# Altium PCB B155AA.PcbDoc
Units mm, origin at the board's own origin, x right, y up, seen from the top; angles counter-clockwise.
Board outline 40.25 x 32.25 mm, 2 copper layers (Top Layer, Bottom Layer), stack 1.57 mm thick; 27 components, 17 nets, 119 pads, 27 vias.
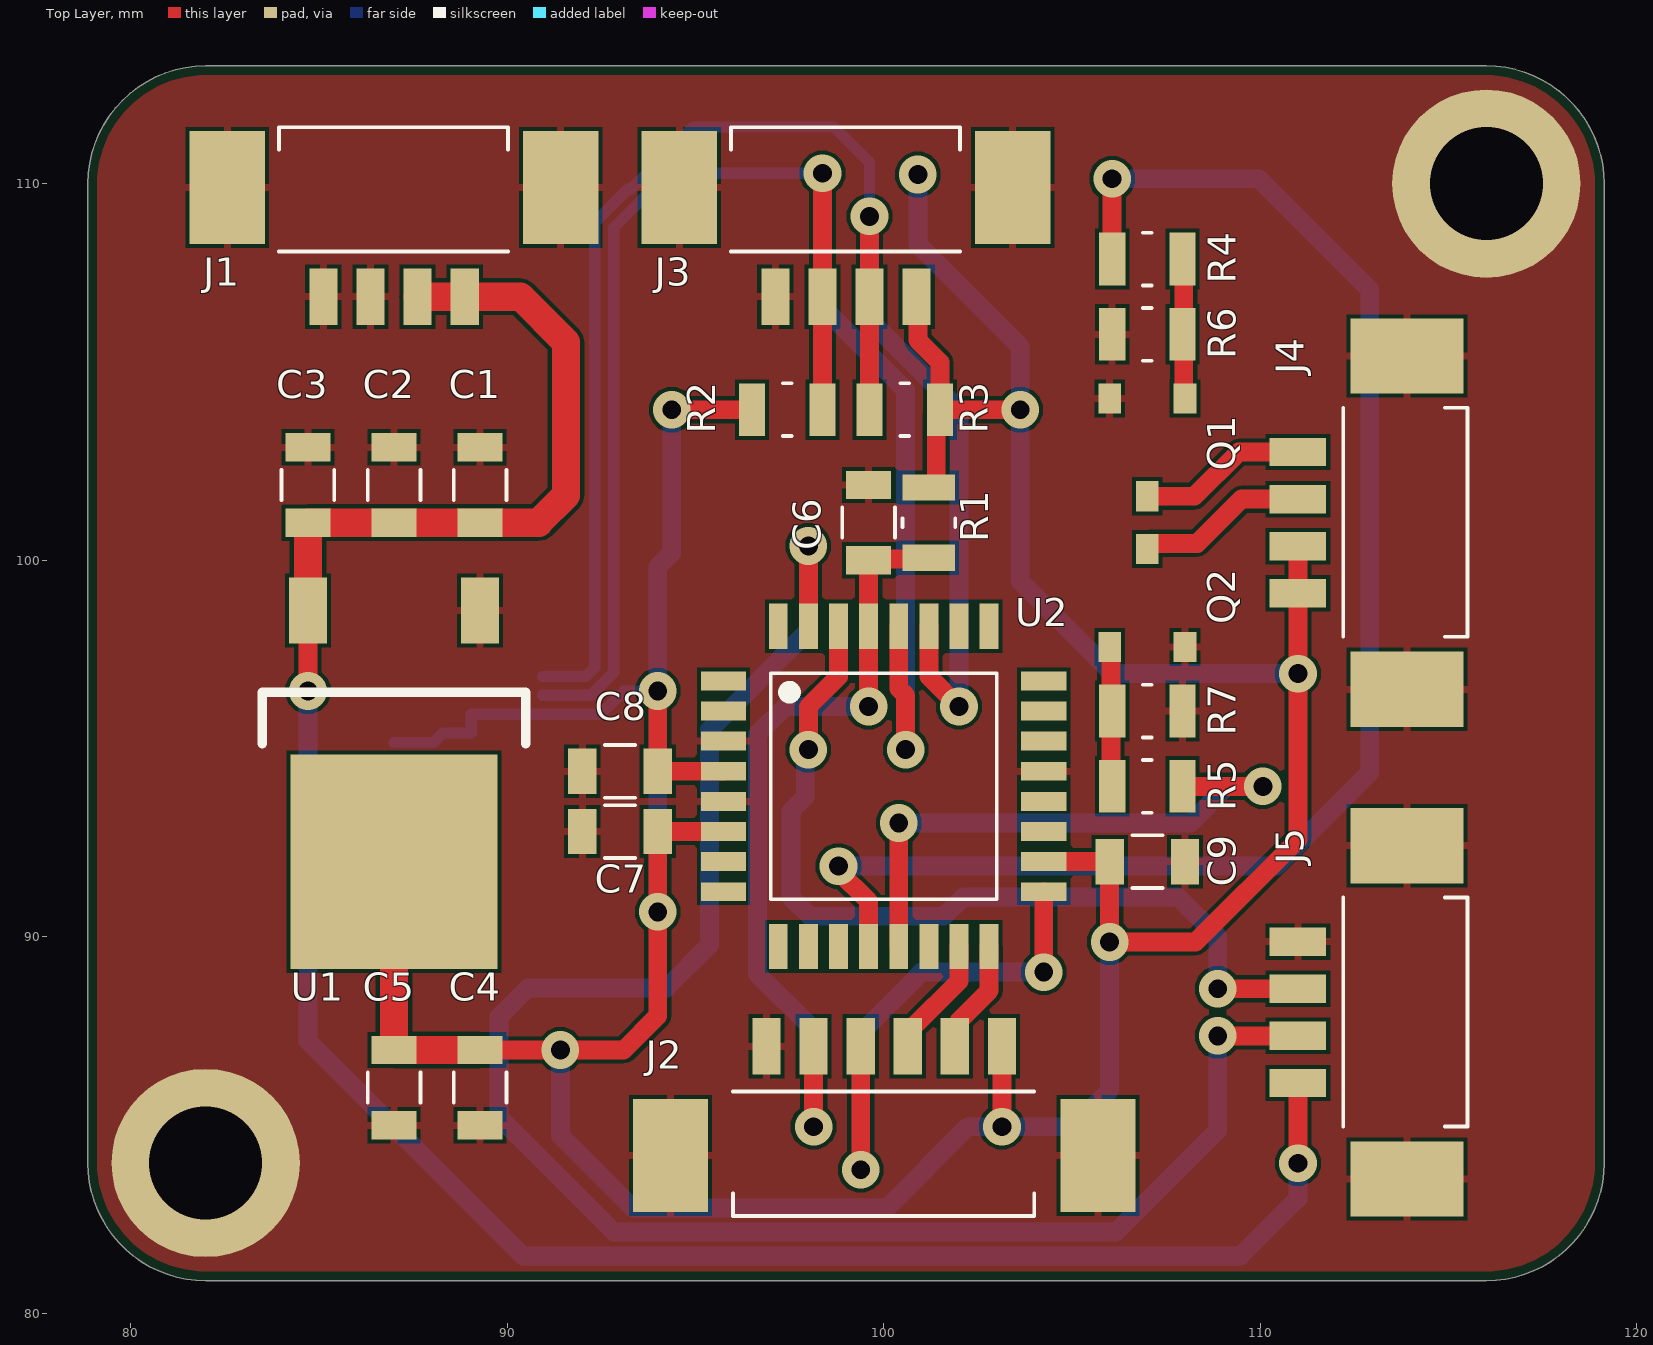
[diagram p0: Top Layer view]
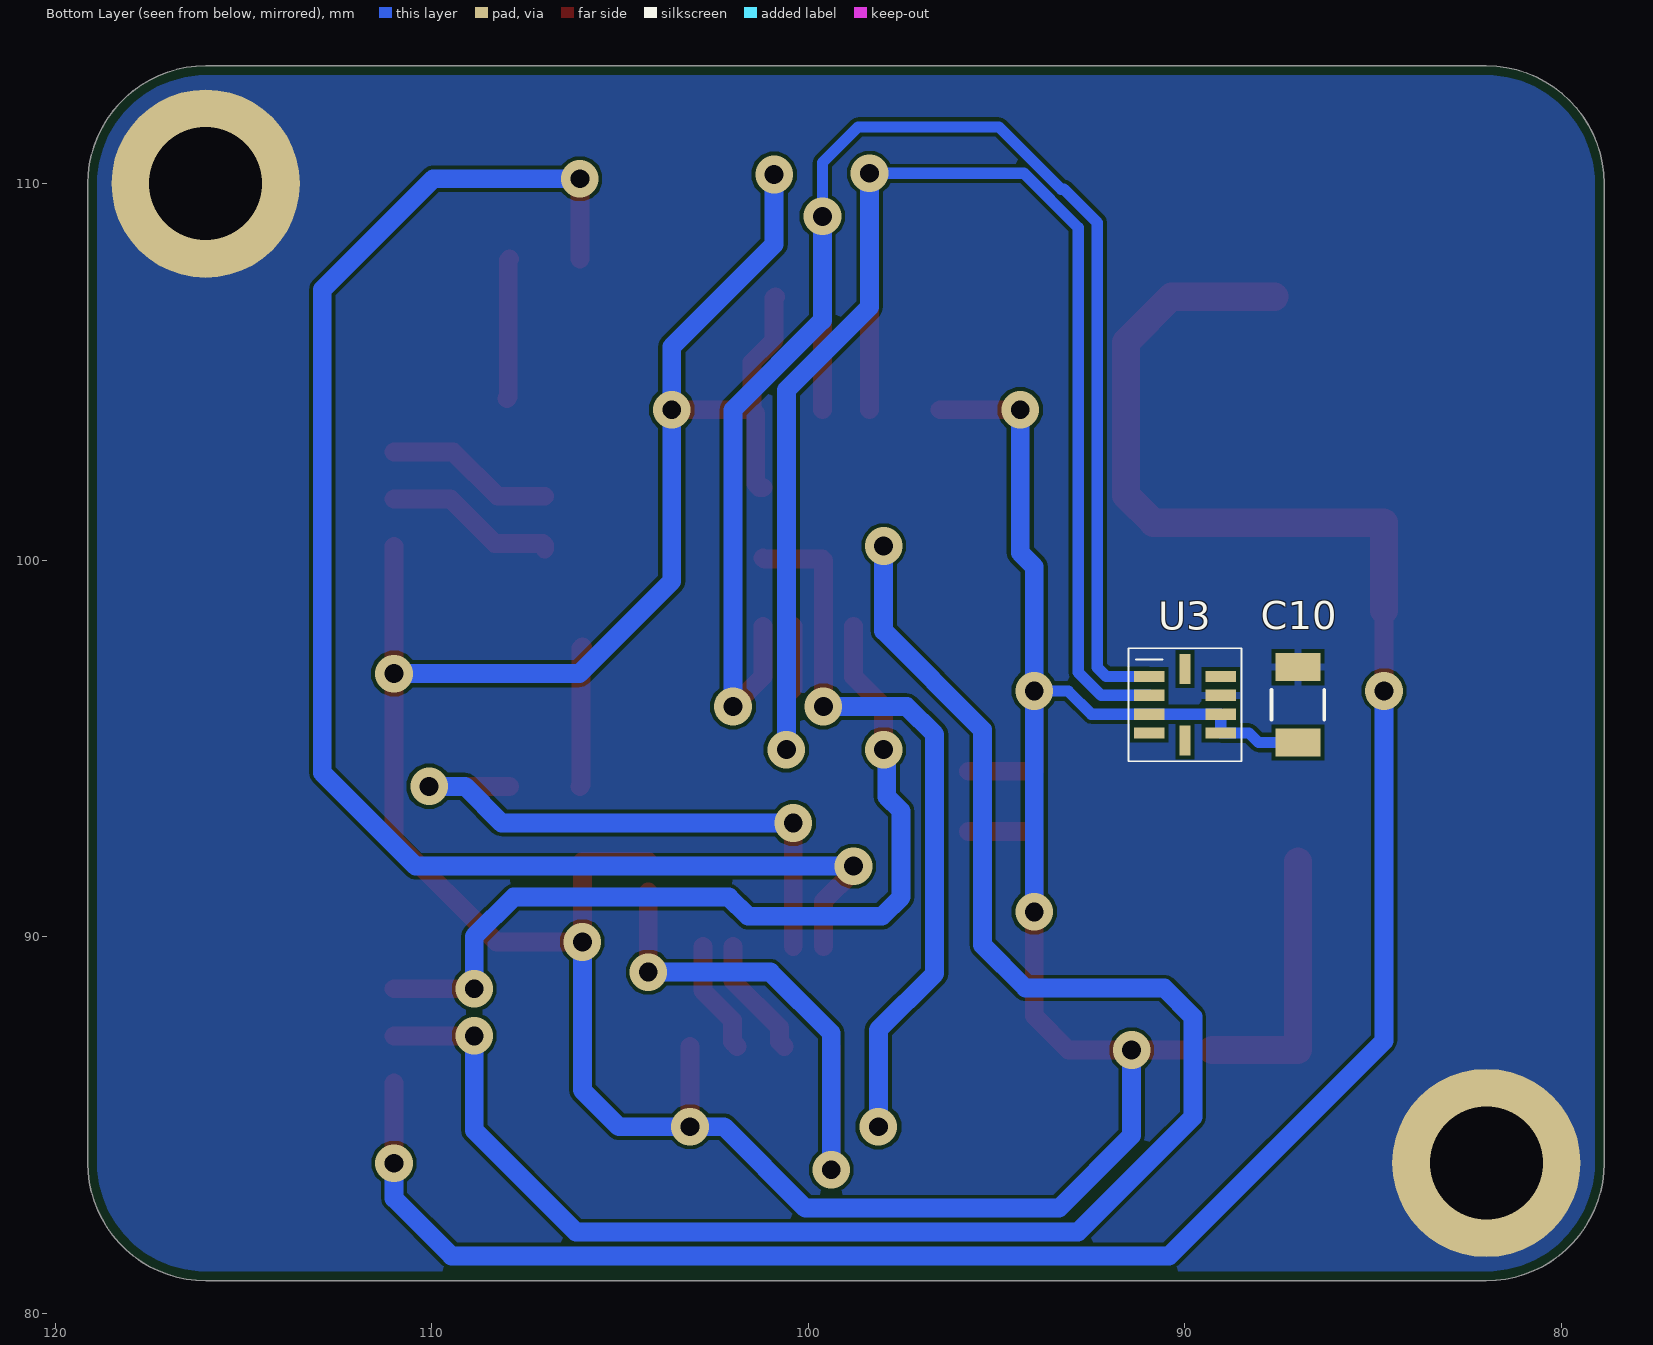
[diagram p1: Bottom Layer view, seen from below]
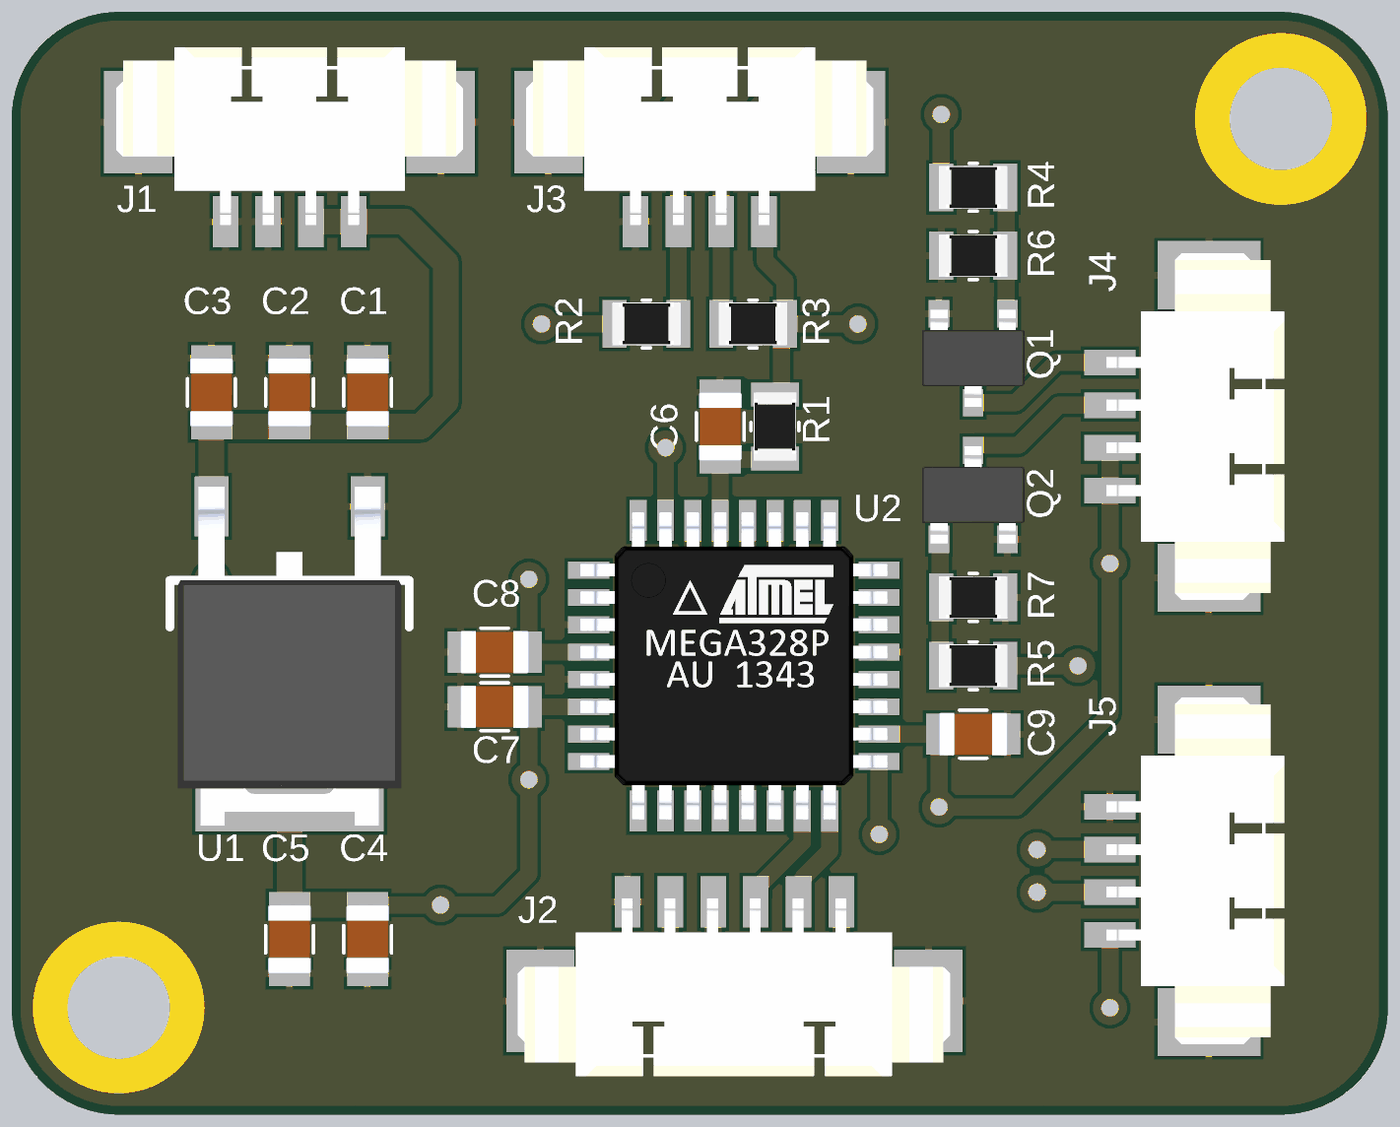
[diagram p2: 3D render of the assembled board from above, using the file's embedded part models]

## Layer stack, top to bottom
Top Solder: solder mask 0.0127, Solder Resist, Dk 3.8
Top Layer: signal copper 0.035
Dielectric: core 1.5, FR-4, Dk 4.5
Bottom Layer: signal copper 0.035
Bottom Solder: solder mask 0.0127, Solder Resist, Dk 3.8

## Board outline
78.873,84.068 78.873,110 78.873,110.001 cw(c82,110) 82,113.127 116,113.127 cw(c116,110) 119.127,110 119.127,84 cw(c116,84) 116,80.873 82,80.873 cw(c82,84)

## Design rules (kind name [scope] priority, off if disabled: settings)
BoardOutlineClearance [All] p1: gap=0.25 ignorepadtopadclearanceinfootprint=FALSE except(0: Arc-SplitContinuation Track-SplitContinuation SMDPad-SplitContinuation THPad-SplitContinuation Via-SplitContinuation Fill-SplitContinuation Poly-SplitContinuation Region-SplitContinuation Text-SplitContinuation)
Clearance Clearance-xPP-xTP-xTT [All] p1: gap=0.1 ignorepadtopadclearanceinfootprint=FALSE except(0: Arc-Hole Track-Hole SMDPad-Hole THPad-Hole Via-Hole Fill-Hole Poly-Hole Region-Hole Text-Hole)
ComponentClearance [All] p1: gap=0.25 collisioncheckmode=3 verticalgap=0.25 showdistances=FALSE
DiffPairsRouting [All] p1: maxlimit=0.25 minlimit=0.25 mostfreqgap=0.25 toplayer_minwidth=0.381 toplayer_maxwidth=0.381 toplayer_prefwidth=0.381 bottomlayer_minwidth=0.381 bottomlayer_maxwidth=0.381 bottomlayer_prefwidth=0.381 maxuncoupledlength=12.5
Height [All] p1: minheight=0 maxheight=25 prefheight=12.5
HoleSize HoleSize-PTH [All] p1: absolutevalues=TRUE maxlimit=5 minlimit=0.15 maxpercent=80.000 minpercent=20.000
HoleToHoleClearance [All] p1: gap=0.35 allowstackedmicrovias=TRUE
MinimumAnnularRing "Minimum IAR  <= 0.45mm" [((ObjectKind = 'Pad') OR (ObjectKind = 'Via')) And (Layer = 'MultiLayer') And (HoleDiameter <= AsMM(0.45))] p1: minimumring=0.125 // minimum inner annular ring for pads <= 0.45mm finished hole size
MinimumAnnularRing "Minimum IAR  > 0.45mm" [((ObjectKind = 'Pad') OR (ObjectKind = 'Via')) And (Layer = 'MultiLayer') And (HoleDiameter > AsMM(0.45))] p2: minimumring=0.125 // minimum inner annular ring for pads > 0.45mm finished hole size
MinimumAnnularRing Minimum-IAR [All] p3: minimumring=0.125
MinimumSolderMaskSliver [All] p1: minsoldermaskwidth=0.08
PlaneClearance [InNet('ANT_GSM')] p1: clearance=0.05
PlaneClearance PlaneClearance-IPI [All] p2: clearance=0.25
PlaneConnect [All] p1: planeconnectstyle=Relief reliefexpansion=0.175 reliefentries=4 reliefconductorwidth=0.2 reliefairgap=0.1
PolygonConnect PolygonConnect_Via [All vs (ObjectKind = 'Via') And (HoleDiameter <= AsMM(0.45))] p1: connectstyle=Direct reliefconductorwidth=0.254 reliefentries=4 polygonreliefangle="90 Angle" airgapwidth=0.254
PolygonConnect PolygonConnect-xTW [All] p2: connectstyle=Relief reliefconductorwidth=0.2 reliefentries=4 polygonreliefangle="90 Angle" airgapwidth=0.1
RoutingCorners [All] p1: cornerstyle=45-Degree minsetback=2.5 maxsetback=2.5
RoutingVias "RoutingVias <= 0.45mm" [(ObjectKind = 'Via') And (HoleDiameter <= AsMM(0.45))] p1: holewidth=0.2 width=0.55 viastyle="Through Hole" minholewidth=0.15 minwidth=0.5 maxholewidth=0.45 maxwidth=0.8
RoutingVias "RoutingVias > 0.45mm" [(ObjectKind = 'Via') And (HoleDiameter > AsMM(0.45))] p2: holewidth=0.5 width=0.85 viastyle="Through Hole" minholewidth=0.5 minwidth=0.85 maxholewidth=0.9 maxwidth=1.25
SilkToSilkClearance [All] p1: silktosilkclearance=0.2
SilkToSolderMaskClearance SilkscreenOverComponentPads [IsPad] p1: minsilkscreentomaskgap=0.1 clearancetoexposedcopper=TRUE
SolderMaskExpansion SolderMaskExpansion_Via [(ObjectKind = 'Via') And (HoleDiameter <= AsMM(0.45))] p1: expansion=0.01 istentingtop=TRUE soldermaskfromhole=TRUE
SolderMaskExpansion [All] p2: expansion=0.01 istentingtop=FALSE
UnRoutedNet [All] p1: checkbadconnections=TRUE
Width Width-xTW [All] p1: maxlimit=1.5 minlimit=0.1 preferedwidth=0.2
18 further rules are at their usual default settings.

## Classes and differential pairs
component class "UV Sensor": C10 J3 R2 R3 U3
component class "UV LED": J4 Q1 Q2 R4 R5 R6 R7
component class "Power Regulator": C1 C2 C3 C4 C5 J1 U1
component class MCU: C6 C7 C8 C9 J2 R1 U2
component class B155AA: J5

## Components (designator, comment, footprint, x,y, rotation, side; value= is the part's Value field where it differs from the comment)
C1 "Capacitor - 22uF [1210] (Ceramic)" CAPACITOR_0805 89.285,102 r270 top value=22uF
C2 "Capacitor - 22uF [1210] (Ceramic)" CAPACITOR_0805 87,102 r270 top value=22uF
C3 "Capacitor - 100nF [0805] (MLCC)" CAPACITOR_0805 84.715,102 r270 top value=100nF
C4 "Capacitor - 22uF [1210] (Ceramic)" CAPACITOR_0805 89.285,86 r90 top value=22uF
C5 "Capacitor - 100nF [0805] (MLCC)" CAPACITOR_0805 87,86 r90 top value=100nF
C6 "Capacitor - 100nF [0805] (MLCC)" CAPACITOR_0805 99.6,101 r270 top value=100nF
C7 "Capacitor - 100nF [0805] (MLCC)" CAPACITOR_0805 93,92.8 r0 top value=100nF
C8 "Capacitor - 100nF [0805] (MLCC)" CAPACITOR_0805 93,94.4 r0 top value=100nF
C9 "Capacitor - 100nF [0805] (MLCC)" CAPACITOR_0805 107,92 r180 top value=100nF
C10 "Capacitor - 100nF [0805] (MLCC)" CAPACITOR_0805 87,96.165 r270 bottom value=100nF
J1 "4P SMD Tunic Connector" "Connector_Tunic 4P" 87,108 r180 top
J2 "6P Tunic Connector" "Connector_Tunic 6P" 100,86.095 r0 top
J3 "4P SMD Tunic Connector" "Connector_Tunic 4P" 99,108 r180 top
J4 "4P SMD Tunic Connector" "Connector_Tunic 4P" 112,101 r90 top
J5 "4P SMD Tunic Connector" "Connector_Tunic 4P" 112,88 r90 top
Q1 "BC847AQAZ" SOT-23-3 107,103 r90 top
Q2 "BC847AQAZ" SOT-23-3 107,99 r270 top
R1 "10K - 0805 - %1 - 1/16W" RESISTOR_0805 101.2,101 r90 top value=10K
R2 "10K - 0805 - %1 - 1/16W" RESISTOR_0805 97.44,104 r180 top value=10K
R3 "10K - 0805 - %1 - 1/16W" RESISTOR_0805 100.56,104 r0 top value=10K
R4 "4K7 - 0805 - %1 - 1/16W" RESISTOR_0805 107,108 r180 top value=4K7
R5 "4K7 - 0805 - %1 - 1/16W" RESISTOR_0805 107,94 r0 top value=4K7
R6 "47K - 0805 - %1 - 1/2W" RESISTOR_0805 107,106 r0 top value=47K
R7 "47K - 0805 - %1 - 1/2W" RESISTOR_0805 107,96 r180 top value=47K
U1 "LDO Regulator" TO-252 87,92 r180 top
U2 "8-bit MicroController" TQFN-32 100,94 r0 top
U3 "Si1145-A10-GMR" SI1145 90,96.165 r180 bottom

## Footprints (in the part's own frame and the unit in brackets; to place one, negate y for a bottom-side part, rotate by r counter-clockwise, add the part's x,y. Pads: shape width x height; smd on the part's side, far side on the other; paste and mask are expansions set on the pad)
CAPACITOR_0805 [mm] "0805 Case Capacitor"
  rect 0.75x1.2 smd mask+0.01: 1(-1,0) 2(1,0)
  silkscreen extent -0.4,-0.7 0.4,0.7, body extent -1,-0.63 1,0.63, height 1.44
"Connector_Tunic 4P" [mm] "4P Tunic Connector"
  rect 0.75x1.5 smd mask+0.01: 1(-1.875,1) 2(-0.625,1) 3(0.625,1) 4(1.875,1)
  rect 2x3 smd mask+0.01: 5(-4.425,-1.9) 6(4.425,-1.9)
  silkscreen extent -3.03,-3.5 3.05,-0.2, body extent -5.07,-4.1 5.08,1.1, height 3.4
"Connector_Tunic 6P" [mm] "6P Tunic Connector"
  rect 0.75x1.5 smd mask+0.01: 1(3.14,1) 2(1.89,1) 3(0.64,1) 4(-0.61,1) 5(-1.86,1) 6(-3.11,1)
  rect 2x3 smd mask+0.01: 7(-5.66,-1.9) 8(5.69,-1.9)
  silkscreen extent -4,-3.5 4,-0.2, body extent -6.32,-4.1 6.32,1.1, height 3.4
RESISTOR_0805 [mm] "Chip Resistor, IPC High Density"
  rect 0.7x1.4 smd mask+0.01: 1(-0.935,0) 2(0.935,0)
  silkscreen extent -0.12,-0.7 0.12,0.7, body extent -1,-0.63 1,0.63, height 0.45
SI1145 [mm] "UV Sensor"
  rect 0.8x0.3 smd mask+0.01: 1(-0.95,0.75) 2(-0.95,0.25) 3(-0.95,-0.25) 4(-0.95,-0.75) 6(0.95,-0.75) 7(0.95,-0.25) 8(0.95,0.25) 9(0.95,0.75)
  rect 0.3x0.8 smd mask+0.01: 5(0,-0.95) 10(0,0.95)
  silkscreen extent -1.5,-1.5 1.5,1.5, body extent -1.02,-1.02 1.02,1.02, height 0.7
SOT-23-3 [mm]
  rect 0.8x0.6 smd mask+0.01: 1(1.3,-1) 2(1.3,1) 3(-1.3,0)
  body extent -1.42,-1.5 1.42,1.5, height 1.22
TO-252 [mm] "LDO Voltage Regulators 800MA LDO LINEAR REG"
  rect 1x1.75 smd mask+0.01: 1(-2.285,-6.665) 3(2.285,-6.665)
  rect 5.5x5.7 smd mask+0.01: 2(0,0)
  silkscreen extent -3.5,-4.5 3.5,-3.14, body extent -3.27,-7.24 3.27,2.67, height 2.55
TQFN-32 [mm]
  rect 1.2x0.5 smd mask+0.01: 1(-4.25,2.8) 2(-4.25,2) 3(-4.25,1.2) 4(-4.25,0.4) 5(-4.25,-0.4) 6(-4.25,-1.2) 7(-4.25,-2) 8(-4.25,-2.8) 17(4.25,-2.8) 18(4.25,-2) 19(4.25,-1.2) 20(4.25,-0.4) 21(4.25,0.4) 22(4.25,1.2) 23(4.25,2) 24(4.25,2.8)
  rect 0.5x1.2 smd mask+0.01: 9(-2.8,-4.25) 10(-2,-4.25) 11(-1.2,-4.25) 12(-0.4,-4.25) 13(0.4,-4.25) 14(1.2,-4.25) 15(2,-4.25) 16(2.8,-4.25) 25(2.8,4.25) 26(2,4.25) 27(1.2,4.25) 28(0.4,4.25) 29(-0.4,4.25) 30(-1.2,4.25) 31(-2,4.25) 32(-2.8,4.25)
  silkscreen extent -3,-3 3,3, body extent -4.5,-4.5 4.5,4.5, height 1.1

## Part data
C1 C2 C4: library part "Capacitor - 22uF [0805-25V]", "Multilayer Ceramic Capacitors MLCC - SMD/SMT 22UF 25V 10% 1210", Case=0805, Manufacturer Name=Murata, Manufacturer Part Number=GRM21BR61E226ME44L, Tolerance=20%, Voltage=25V
C3 C5 C6 C7 C8 C9 C10: library part "Capacitor - 100nF [0805-10V]", "Capacitor (MLCC) - 100nF / 10V / 0805", Case=0805, Manufacturer Name=KEMET, Manufacturer Part Number=C0805C104K8JACAUTO, Tolerance=%1, Voltage=10V, Subcategory=Capacitors
J1 J3 J4 J5: library part "Connector - Mini Tunic 4P (1.25)", "Mini Tunic Connector with 4P", Case=SMD, Manufacturer Name=Molex, Manufacturer Part Number=53261-0471, ComponentLink1Description=DataSheet, ComponentLink1URL=https://www.mouser.com.tr/datasheet/2/276/0532610471_PCB_HEADERS-170942.pdf, ComponentLink2Description=Mouser, ComponentLink2URL=https://www.mouser.com.tr/ProductDetail/Molex/53261-0471?qs=%2Fha2pyFaduhLhIsk8tywtK7BwWtguBSP4XxyDBTOTfs%3D, Pitch=1.25mm, Position=4, ROHS=Yes
J2: library part "Connector - Mini Tunic 6P (1.25)", "Mini Tunic Connector with 6P", Manufacturer Name=Molex, Manufacturer Part Number=53261-0671, ROHS=Yes
Q1 Q2: library part "Transistor - BC847 (SOT23-3)", "Bipolar NPN Transistors", Case=SOT23-3, Manufacturer Name=Nexperia, Manufacturer Part Number=BC847, Polarity=NPN
R1 R2 R3: library part "Resistor - 10K [0805]", "Thick Film Resistors - SMD 1/16 W 10 KOhm 1%", Case=0805, Manufacturer Name=Vishay, Manufacturer Part Number=CRCW040210K0FKED, Power=1/16W, Tolerance=%1, ComponentLink1Description=DataSheet, ComponentLink1URL=https://www.mouser.com.tr/datasheet/2/427/dcrcwe3-1762152.pdf, ComponentLink2Description=Mouser, ComponentLink2URL=https://www.mouser.com.tr/ProductDetail/Vishay-Dale/CRCW040210K0FKED?qs=sGAEpiMZZMu61qfTUdNhG2DpbjADlD3GcalbOv9utCY%3D
R4 R5: library part "Resistor - 4K7 [0805]", "Thick Film Resistors - SMD 1/16 W 4.7 KOhm 1%", Case=0805, Manufacturer Name=Vishay, Manufacturer Part Number=CRCW08054K70FKEC, Power=1/8W, Tolerance=%1, ComponentLink1Description=DataSheet, ComponentLink1URL=https://www.mouser.com.tr/datasheet/2/427/dcrcwe3-1762152.pdf, ComponentLink2Description=Mouser, ComponentLink2URL=https://www.mouser.com.tr/ProductDetail/Vishay-Dale/CRCW04024K70FKED?qs=sGAEpiMZZMu61qfTUdNhG7nHf%2F6MTUn3HadIdDQu24Q%3D
R6 R7: library part "Resistor - 47K [0805]", "Thick Film Resistors - SMD 1/2 W 47 KOhm 1%", Case=0805, Manufacturer Name=Vishay, Manufacturer Part Number=CRCW080547K0FKECHP, Power=1/2W, Tolerance=%1
U1: library part "IC - LM1117DT-3.3/NOPB", "LDO Voltage Regulators 800MA LDO LINEAR REG", Case=TO-252-3, Manufacturer Name="Texas Instruments", Manufacturer Part Number=LM1117DT-3.3/NOPB
U2: library part "IC - ATMEGA328P-AU", "8-bit Microcontrollers - MCU 32KB In-system Flash 20MHz 1.8V-5.5V", Case=TQFP-32, Manufacturer Name="Microchip Technology / Atmel", Manufacturer Part Number=ATMEGA328P-AU, Maximum Operating Temperature=+85, Minimum Operating Temperature=-40, Supply Voltage - Max=5.5V, Supply Voltage - Min=1.8V, ComponentLink1Description=DataSheet, ComponentLink1URL=http://ww1.microchip.com/downloads/en/DeviceDoc/ATmega48A-PA-88A-PA-168A-PA-328-P-DS-DS40002061A.pdf, ComponentLink2Description=Mouser, ComponentLink2URL=https://www.mouser.com.tr/ProductDetail/Microchip-Technology-Atmel/ATMEGA328P-AU?qs=sGAEpiMZZMtVoztFdqDXO3RbBx7FKCmV, ComponentLink3Description=ProductPage, ComponentLink3URL=https://www.microchip.com/wwwproducts/en/ATmega328p, Height=1mm, ROHS=Yes
U3: library part "IC - Si1145-A10-GMR", "Proximity Sensors I2C UV Index and Proximity/Ambient Light Sensor with 1 LED Driver", Case=QFN-10, Manufacturer Name="Silicon Labs", Manufacturer Part Number=SI1145-A10-GMR, ROHS=Yes

## Free pads (board coordinates)
  round 5 hole 3: 2(82,84) 2(116,110)

## Via types
v1: diameter 1, hole 0.5, Top Layer to Bottom Layer, tented both sides, 27 vias

## Nets (pads, with @x,y where several pads share a name; then routed paths per layer and width w, separated by ;. In a path a pad name is that pad's centre, name@x,y a point inside that pad or via, vN(x,y) a via of type N, cw(c..) or ccw(c..) an arc to the next point about the centre after c; other vN are vias at no path point)
3V3: C4.2 C5.2 C7.2 C8.2 C9.2 C10.2 J2.1 J3.1 J4.1 J4.2 R1.2 R2.2 R3.2 U1.2 U2.4 U2.6 U2.18 U3.3 U3.6 U3.7 | length 117.2
  Top Layer w0.5: C4.2 v1(91.417,87) 93.096,87 94,87.904 v1(94,90.668) C7.2 U2.6 ; v1(94,96.532) C8.2 U2.4 ; v1(94.373,104) R2.2 ; J3.1 100.908,106.967 100.908,105.848 101.495,105.261 R3.2 ; R1.2 101.295,101.935 101.395,102.035 101.395,103.9 R3.2 ; v1(103.14,84.963) J2.1 ; v1(103.627,104) R3.2 ; U2.18 C9.2 v1(106,89.868) 108.283,89.868 111,92.585 v1(111,96.993) J4.1 J4.2
  Top Layer w0.75: U1.2 C5.2 C4.2
  Bottom Layer w0.3: C10.2 88.05,95.165 88.3,95.415 U3.6 U3.7 U3.3 92.486,95.915 93.103,96.532 v1(94,96.532)
  Bottom Layer w0.5: v1(91.417,87) 91.417,84.732 93.345,82.804 100.076,82.804 102.235,84.963 105.029,84.963 106,85.934 v1(106,89.868) ; v1(94,90.668) v1(94,96.532) 94,99.83 94.373,100.203 v1(94.373,104) ; v1@100.908,110.267 v1(100.908,110.242) 100.908,108.388 103.627,105.669 v1(103.627,104) 103.627,99.446 106.08,96.993 v1(111,96.993)
BAT+: C1.2 C2.2 C3.2 J1.1 J1.2 J5.1 U1.3 | length 61.8
  Top Layer w0.5: v1(84.715,96.533) U1.3 ; v1(111,83.993) J5.1
  Top Layer w0.75: U1.3 C3.2 C2.2 C1.2 90.84,101 91.567,101.727 91.567,105.791 90.358,107 J1.1 J1.2
  Bottom Layer w0.5: v1(84.715,96.533) 84.715,87.243 90.424,81.534 109.474,81.534 111,83.06 v1(111,83.993)
GND: C1.1 C2.1 C3.1 C4.1 C5.1 C6.1 C7.1 C8.1 C9.1 C10.1 J1.3 J1.4 J1.5 J1.6 J2.6 J2.7 J2.8 J3.4 J3.5 J3.6 J4.5 J4.6 J5.4 J5.5 J5.6 pad.2 Q1.2 Q2.2 R6.1 R7.1 U1.1 U2.3 U2.5 U2.21 U3.8
MISO: J2.2 U2.16 | length 3
  Top Layer w0.5: J2.2 102.015,87.22 102.015,87.791 102.8,88.576 U2.16
MOSI: J2.3 U2.15 | length 3.2
  Top Layer w0.5: J2.3 100.765,87.22 100.765,87.595 102,88.83 U2.15
NetJ4_3: J4.3 Q2.3 | length 4.6
  Top Layer w0.5: Q2.3 107,100.4 107.05,100.45 108.324,100.45 109.499,101.625 J4.3
NetJ4_4: J4.4 Q1.3 | length 4.5
  Top Layer w0.5: Q1.3 108.25,101.7 109.425,102.875 J4.4
R\E\S\E\T\: C6.2 J2.5 R1.1 U2.29 | length 21.9
  Top Layer w0.5: v1(98.14,84.963) J2.5 ; v1(99.6,96.118) U2.29 C6.2 99.633,100.032 101.168,100.032 R1.1
  Bottom Layer w0.5: v1(98.14,84.963) 98.14,87.534 96.647,89.027 96.647,95.377 97.388,96.118 v1(99.6,96.118)
RX: J5.3 U2.30 | length 23.4
  Top Layer w0.5: v1(98,94.975) 98,96.11 98.8,96.91 U2.30 ; v1(108.868,88.625) J5.3
  Bottom Layer w0.5: v1(98,94.975) 97.916,94.891 97.916,93.725 97.536,93.345 97.536,91.059 98.044,90.551 101.6,90.551 102.108,91.059 107.823,91.059 108.868,90.014 v1(108.868,88.625)
SCK: J2.4 U2.17 | length 14.6
  Top Layer w0.5: v1(99.39,83.82) J2.4 ; v1(104.25,89.068) U2.17
  Bottom Layer w0.5: v1(99.39,83.82) 99.39,87.452 101.006,89.068 v1(104.25,89.068)
SCL: J3.3 R2.1 U2.28 U3.2 | length 45.9
  Top Layer w0.5: R2.1 J3.3 v1(98.375,110.275) ; U2.28 100.4,96.597 100.584,96.413 v1(100.584,94.975)
  Bottom Layer w0.3: U3.2 92.224,96.415 92.837,97.028 92.837,108.839 94.273,110.275 v1(98.375,110.275)
  Bottom Layer w0.5: v1(98.375,110.275) 98.375,106.73 100.584,104.521 v1(100.584,94.975)
SDA: J3.2 R3.1 U2.27 U3.1 | length 45.1
  Top Layer w0.5: R3.1 J3.2 v1(99.625,109.132) ; U2.27 101.2,96.918 v1(102,96.118)
  Bottom Layer w0.3: U3.1 92.089,96.915 92.329,97.155 92.329,108.966 93.218,109.855 93.287,109.855 94.938,111.506 98.679,111.506 99.625,110.56 v1(99.625,109.132)
  Bottom Layer w0.5: v1(99.625,109.132) 99.625,106.369 102,103.994 v1(102,96.118)
TX: J5.2 U2.31 | length 49
  Top Layer w0.5: U2.31 v1(98,100.382) ; v1(108.868,87.375) J5.2
  Bottom Layer w0.5: v1(98,100.382) 98,98.127 95.377,95.504 95.377,89.789 94.234,88.646 90.551,88.646 89.789,87.884 89.789,85.217 92.837,82.169 106.172,82.169 108.868,84.865 v1(108.868,87.375)
UV_LED_1: R4.2 U2.12 | length 40.6
  Top Layer w0.5: v1(98.8,91.882) 98.8,91.747 99.6,90.947 U2.12 ; R4.2 v1(106.065,110.132)
  Bottom Layer w0.5: v1(98.8,91.882) 110.424,91.882 112.903,94.361 112.903,107.188 109.959,110.132 v1(106.065,110.132)
UV_LED_1_: Q1.1 R4.1 R6.2 | length 3.7
  Top Layer w0.5: R4.1 107.967,107.968 107.967,104.332 Q1.1
UV_LED_2: R5.2 U2.13 | length 15.5
  Top Layer w0.5: U2.13 v1(100.4,93.025) ; R5.2 v1(110.067,94)
  Bottom Layer w0.5: v1(100.4,93.025) 108.138,93.025 109.113,94 v1(110.067,94)
UV_LED_2_: Q2.1 R5.1 R7.2 | length 3.7
  Top Layer w0.5: Q2.1 106.032,97.668 106.032,94.032 R5.1
pads on no net: U2.1 U2.2 U2.7 U2.8 U2.9 U2.10 U2.11 U2.14 U2.19 U2.20 U2.22 U2.23 U2.24 U2.25 U2.26 U2.32 U3.4 U3.5 U3.9 U3.10

## Polygon pours and split planes (outlines as drawn)
GND on Top Layer "GND_L01_P000" (solid, pour order 0): 78.873,84.068 78.873,110 78.873,110.001 cw(c82,110) 82,113.127 116,113.127 cw(c116,110) 119.127,110 119.127,84 cw(c116,84) 116,80.873 82,80.873 cw(c82,84)
GND on Bottom Layer "GND_L02_P001" (solid, pour order 1): 78.873,84.068 78.873,110 78.873,110.001 cw(c82,110) 82,113.127 116,113.127 cw(c116,110) 119.127,110 119.127,84 cw(c116,84) 116,80.873 82,80.873 cw(c82,84)

## Silkscreen, mask and mechanical layers (free items; w line width, h text height)
Mechanical 1:
  lines w0.254: 79,84 ccw(c82,84) 82,81 ; 79,84.068 79,110 cw(c82,110) 82,113 116,113 cw(c116,110) 119,110 119,84 cw(c116,84) 116,81 82.068,81